# EAGLE board Power_Supply12 (EAGLE 7.6.0)
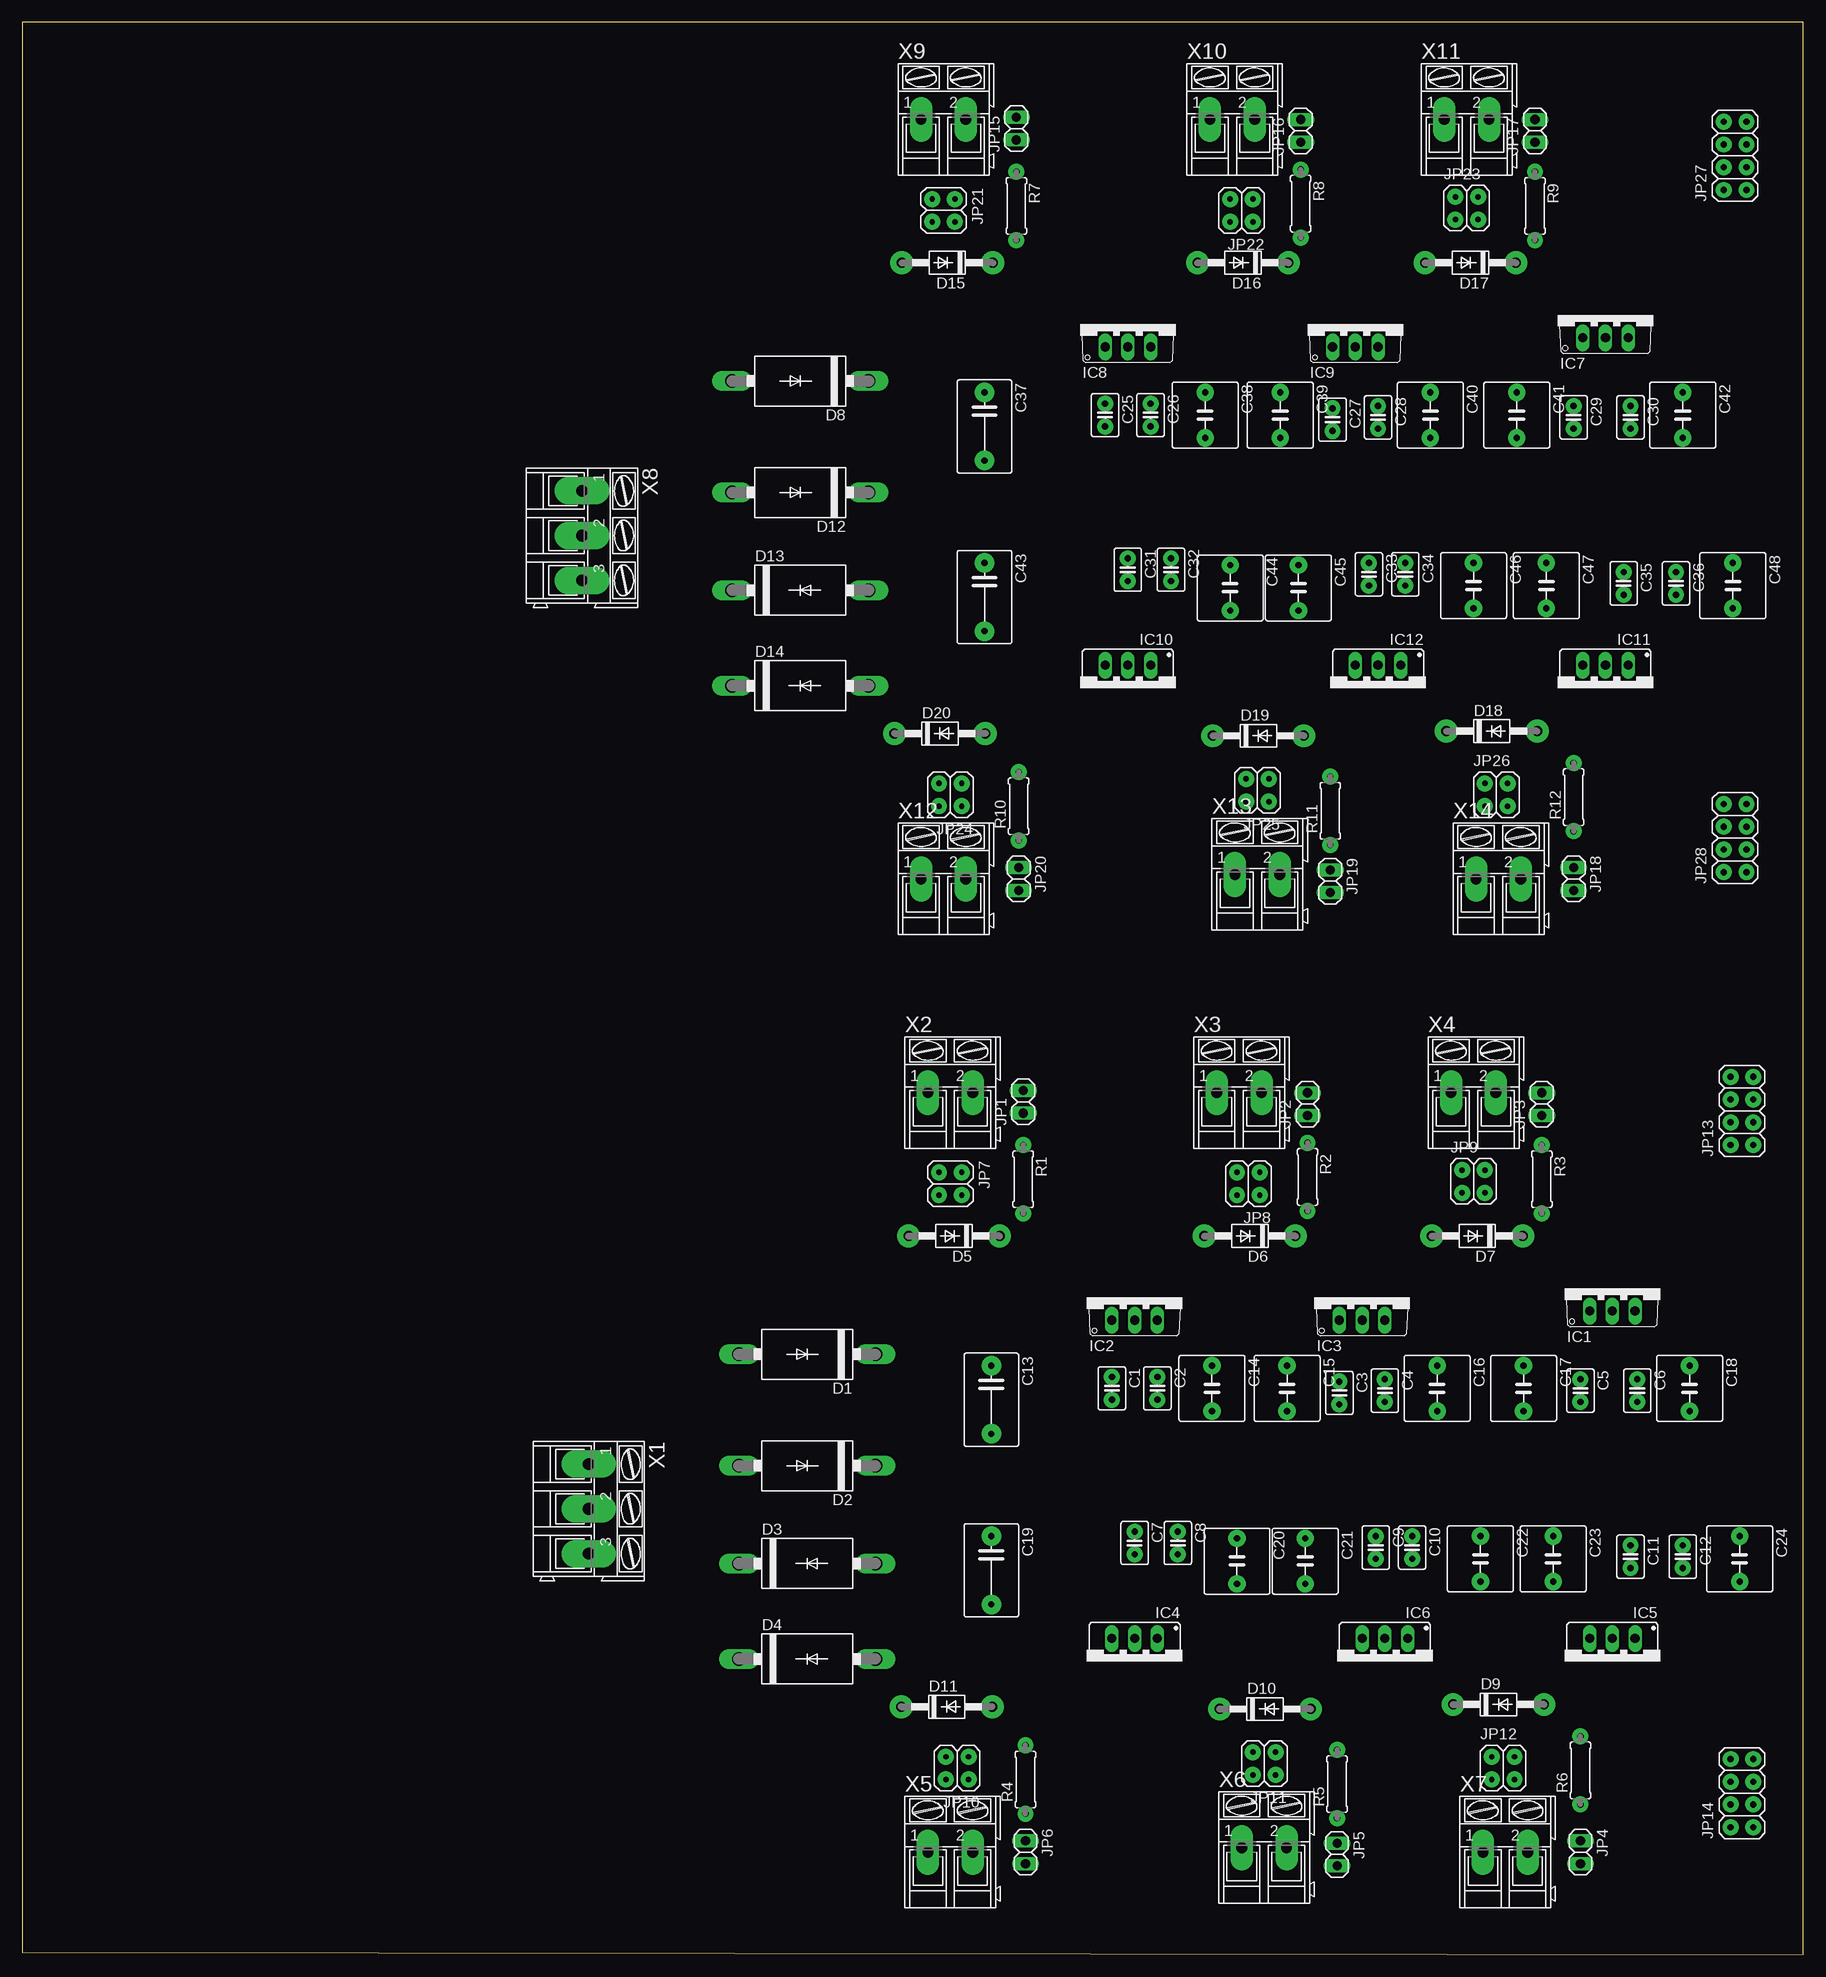
[diagram p0: board, top side]
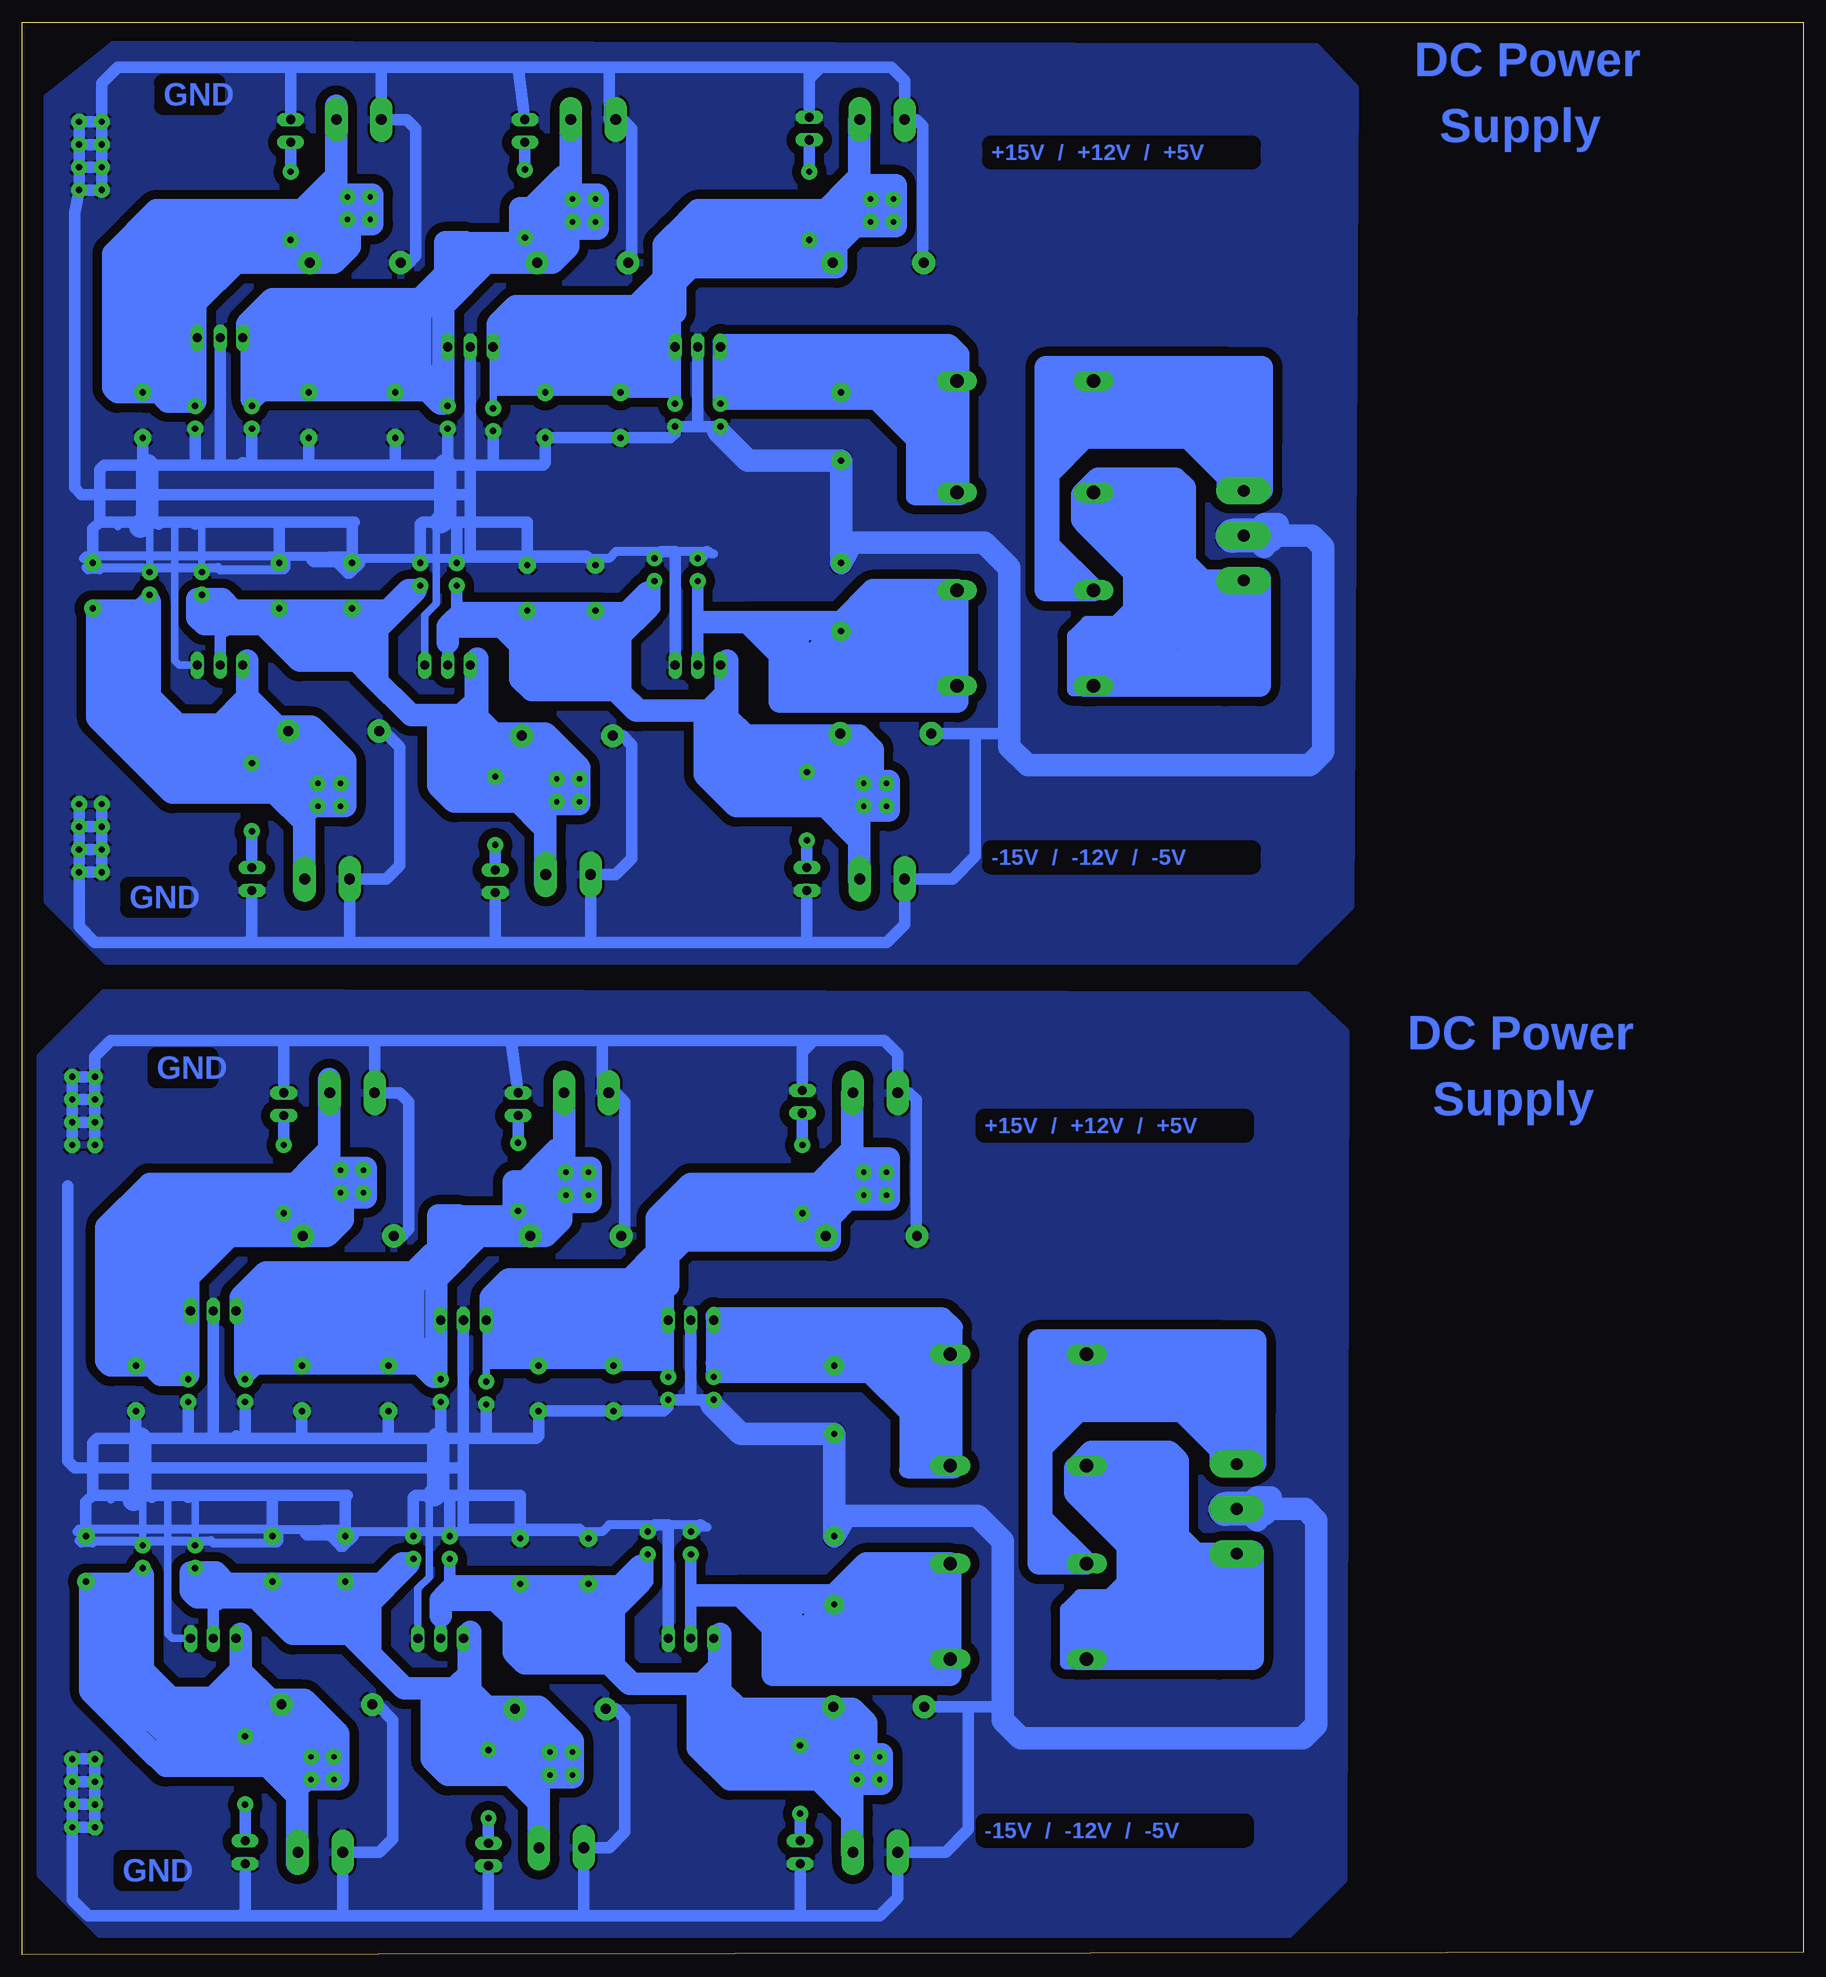
[diagram p1: board, bottom side, seen from below]

Size 198.86 x 215.82 mm. Coordinates in mm from the lower left corner, seen from the top.
Outline: 0,0.25 198.86,0 198.86,215.82 0,215.82 0,0.25
Copper layers (1*16): Top 0.035mm / dielectric 1.5mm / Bottom 0.035mm
Design rules "default": minimum track width 10mil, minimum drill 24mil, track to track 8mil, track to pad 8mil, pad to pad 8mil, via to via 8mil, smd to smd 8mil, copper to edge 40mil, drill to drill 8mil, minimum pad ring 10mil, minimum via ring 8mil, stop-mask expansion 4mil, vias tented up to drill 0mil, thermal gap 10mil

## Footprints (pad centres in the part's own frame; a part is rotated, then mirrored left to right if it is on the bottom)
C025-030X050 = drill 0.7 pad 1.778: 1 -1.27,0; 2 1.27,0
C075-063X106 = drill 0.7 pad 2.184: 1 -3.81,0; 2 3.81,0
C050-075X075 = drill 0.7 pad 1.93: 1 -2.54,0; 2 2.54,0
DO201-15 = drill 1.499 long: A 7.62,0; C -7.62,0
DO41-10 = drill 1.1 pad 2.54: A 5.08,0 | drill 1.118 pad 2.54: C -5.08,0
TO220V = drill 1.016 long: 1 -2.54,-2.54; 2 0,-2.54; 3 2.54,-2.54
79XXS = drill 1.016 long: GND -2.54,-2.54; IN 0,-2.54; OUT 2.54,-2.54
1X02 = drill 1.016 long: 1 -1.27,0; 2 1.27,0
2X02 = drill 0.6 pad 1.778: 1 -1.27,-1.27; 2 -1.27,1.27; 3 1.27,-1.27; 4 1.27,1.27
2X04 = drill 0.7 pad 1.778: 1 -3.81,-1.27; 2 -3.81,1.27; 3 -1.27,-1.27; 4 -1.27,1.27; 5 1.27,-1.27; 6 1.27,1.27; 7 3.81,-1.27; 8 3.81,1.27
0207/7 = drill 0.7 pad 1.778: 1 -3.81,0; 2 3.81,0
AK300/3 = drill 1.321 pad 3.048 long: 1 -5.004,0; 2 0,0; 3 5.004,0
AK300/2 = drill 1.2 pad 2.54 long: 1 -2.515,0; 2 2.489,0

## Placement (x,y rotation side)
C1  [C025-030X050]  121.67,63.25 270 top
C2  [C025-030X050]  126.75,63.25 270 top
C3  [C025-030X050]  147.07,62.74 270 top
C4  [C025-030X050]  152.15,62.99 270 top
C5  [C025-030X050]  173.99,62.99 270 top
C6  [C025-030X050]  180.34,62.99 270 top
C7  [C025-030X050]  124.21,45.97 270 top
C8  [C025-030X050]  129.03,45.97 270 top
C9  [C025-030X050]  151.13,45.47 270 top
C10  [C025-030X050]  155.19,45.47 270 top
C11  [C025-030X050]  179.58,44.45 270 top
C12  [C025-030X050]  185.42,44.45 270 top
C13  [C075-063X106]  108.2,61.98 270 top
C14  [C050-075X075]  132.84,63.25 270 top
C15  [C050-075X075]  141.22,63.25 270 top
C16  [C050-075X075]  157.99,63.25 270 top
C17  [C050-075X075]  167.64,63.25 270 top
C18  [C050-075X075]  186.18,63.25 270 top
C19  [C075-063X106]  108.2,42.93 270 top
C20  [C050-075X075]  135.64,43.94 270 top
C21  [C050-075X075]  143.26,43.94 270 top
C22  [C050-075X075]  162.81,44.2 270 top
C23  [C050-075X075]  170.94,44.2 270 top
C24  [C050-075X075]  191.77,44.2 270 top
C25  [C025-030X050]  120.9,171.96 270 top
C26  [C025-030X050]  125.98,171.96 270 top
C27  [C025-030X050]  146.3,171.45 270 top
C28  [C025-030X050]  151.38,171.7 270 top
C29  [C025-030X050]  173.23,171.7 270 top
C30  [C025-030X050]  179.58,171.7 270 top
C31  [C025-030X050]  123.44,154.69 270 top
C32  [C025-030X050]  128.27,154.69 270 top
C33  [C025-030X050]  150.37,154.18 270 top
C34  [C025-030X050]  154.43,154.18 270 top
C35  [C025-030X050]  178.82,153.16 270 top
C36  [C025-030X050]  184.66,153.16 270 top
C37  [C075-063X106]  107.44,170.69 270 top
C38  [C050-075X075]  132.08,171.96 270 top
C39  [C050-075X075]  140.46,171.96 270 top
C40  [C050-075X075]  157.23,171.96 270 top
C41  [C050-075X075]  166.88,171.96 270 top
C42  [C050-075X075]  185.42,171.96 270 top
C43  [C075-063X106]  107.44,151.64 270 top
C44  [C050-075X075]  134.87,152.65 270 top
C45  [C050-075X075]  142.49,152.65 270 top
C46  [C050-075X075]  162.05,152.91 270 top
C47  [C050-075X075]  170.18,152.91 270 top
C48  [C050-075X075]  191.01,152.91 270 top
D1  1N5400  [DO201-15]  87.63,67.06 180 top
D2  1N5400  [DO201-15]  87.63,54.61 180 top
D3  1N5400  [DO201-15]  87.63,43.69 0 top
D4  1N5400  [DO201-15]  87.63,33.02 0 top
D5  1N4004  [DO41-10]  104.05,80.26 180 top
D6  1N4004  [DO41-10]  137.07,80.26 180 top
D7  1N4004  [DO41-10]  162.47,80.26 180 top
D8  1N5400  [DO201-15]  86.87,175.77 180 top
D9  1N4004  [DO41-10]  164.85,27.94 0 top
D10  1N4004  [DO41-10]  138.78,27.43 0 top
D11  1N4004  [DO41-10]  103.22,27.69 0 top
D12  1N5400  [DO201-15]  86.87,163.32 180 top
D13  1N5400  [DO201-15]  86.87,152.4 0 top
D14  1N5400  [DO201-15]  86.87,141.73 0 top
D15  1N4004  [DO41-10]  103.28,188.98 180 top
D16  1N4004  [DO41-10]  136.3,188.98 180 top
D17  1N4004  [DO41-10]  161.7,188.98 180 top
D18  1N4004  [DO41-10]  164.08,136.65 0 top
D19  1N4004  [DO41-10]  138.02,136.14 0 top
D20  1N4004  [DO41-10]  102.46,136.4 0 top
IC1  7805TV  [TO220V]  177.55,74.42 0 top
IC2  7815TV  [TO220V]  124.21,73.41 0 top
IC3  7812TV  [TO220V]  149.61,73.41 0 top
IC4  [79XXS]  124.21,32.77 180 top
IC5  [79XXS]  177.55,32.77 180 top
IC6  [79XXS]  152.15,32.77 180 top
IC7  7805TV  [TO220V]  176.78,183.13 0 top
IC8  7815TV  [TO220V]  123.44,182.12 0 top
IC9  7812TV  [TO220V]  148.84,182.12 0 top
IC10  [79XXS]  123.44,141.48 180 top
IC11  [79XXS]  176.78,141.48 180 top
IC12  [79XXS]  151.38,141.48 180 top
JP1  [1X02]  111.76,95.25 90 top
JP2  [1X02]  143.51,95 90 top
JP3  [1X02]  169.67,95 90 top
JP4  [1X02]  173.99,11.43 270 top
JP5  [1X02]  146.81,11.18 270 top
JP6  [1X02]  112.01,11.43 270 top
JP7  [2X02]  103.63,86.11 270 top
JP8  [2X02]  136.91,86.11 180 top
JP9  [2X02]  162.05,86.36 0 top
JP10  [2X02]  104.39,20.83 180 top
JP11  [2X02]  138.68,21.34 180 top
JP12  [2X02]  165.35,20.83 0 top
JP13  [2X04]  192.02,94.23 90 top
JP14  [2X04]  192.02,18.03 90 top
JP15  [1X02]  111,203.96 90 top
JP16  [1X02]  142.75,203.71 90 top
JP17  [1X02]  168.91,203.71 90 top
JP18  [1X02]  173.23,120.14 270 top
JP19  [1X02]  146.05,119.89 270 top
JP20  [1X02]  111.25,120.14 270 top
JP21  [2X02]  102.87,194.82 270 top
JP22  [2X02]  136.14,194.82 180 top
JP23  [2X02]  161.29,195.07 0 top
JP24  [2X02]  103.63,129.54 180 top
JP25  [2X02]  137.92,130.05 180 top
JP26  [2X02]  164.59,129.54 0 top
JP27  [2X04]  191.26,200.91 90 top
JP28  [2X04]  191.26,124.71 90 top
R1  [0207/7]  111.76,86.61 270 top
R2  [0207/7]  143.51,86.87 270 top
R3  [0207/7]  169.67,86.61 270 top
R4  [0207/7]  112.01,19.56 90 top
R5  [0207/7]  146.81,19.05 90 top
R6  [0207/7]  173.99,20.57 90 top
R7  [0207/7]  111,195.33 270 top
R8  [0207/7]  142.75,195.58 270 top
R9  [0207/7]  168.91,195.33 270 top
R10  [0207/7]  111.25,128.27 90 top
R11  [0207/7]  146.05,127.76 90 top
R12  [0207/7]  173.23,129.29 90 top
X1  [AK300/3]  63.25,49.78 270 top
X2  [AK300/2]  103.63,96.27 0 top
X3  [AK300/2]  135.89,96.27 0 top
X4  [AK300/2]  162.05,96.27 0 top
X5  [AK300/2]  103.63,11.43 0 top
X6  [AK300/2]  138.68,11.94 0 top
X7  [AK300/2]  165.61,11.43 0 top
X8  [AK300/3]  62.48,158.5 270 top
X9  [AK300/2]  102.87,204.98 0 top
X10  [AK300/2]  135.13,204.98 0 top
X11  [AK300/2]  161.29,204.98 0 top
X12  [AK300/2]  102.87,120.14 0 top
X13  [AK300/2]  137.92,120.65 0 top
X14  [AK300/2]  164.85,120.14 0 top

## Library data of the parts
C1-C48 R1-R12 = rcl
D1-D20 = diode
IC1-IC3 IC7-IC9 = linear
IC4-IC6 IC10-IC12 = v-reg
JP1-JP28 = pinhead
X1-X14 = con-ptr500; OC_FARNELL: unknown; OC_NEWARK: unknown

## Nets
N$1: C1.1 C13.1 D1.C D2.C IC2.1
N$2: JP20.1 R10.1
N$3: C2.1 C3.1 C14.1 C15.1 D5.C IC2.3 IC3.1 JP7.1 JP7.2 JP7.3 JP7.4 R1.2 X2.2
N$4: JP19.1 R11.1
N$5: JP18.1 R12.1
N$6: D2.A D4.C X1.3
N$7: C1.2 C2.2 C3.2 C4.2 C5.2 C6.2 C7.1 C8.1 C9.1 C10.1 C11.1 C12.1 C13.2 C14.2 C15.2 C16.2 C17.2 C18.2 C19.1 C20.1 C21.1 C22.1 C23.1 C24.1 D5.A D6.A D7.A D9.C D10.C D11.C IC1.2 IC2.2 IC3.2 IC4.GND IC5.GND IC6.GND JP1.2 JP2.2 JP3.2 JP4.2 JP5.2 JP6.2 JP13.1 JP13.2 JP13.3 JP13.4 JP13.5 JP13.6 JP13.7 JP13.8 JP14.1 JP14.2 JP14.3 JP14.4 JP14.5 JP14.6 JP14.7 JP14.8 X1.2 X2.1 X3.1 X4.1 X5.1 X6.1 X7.1
N$8: C4.1 C5.1 C16.1 C17.1 D6.C IC1.1 IC3.3 JP8.1 JP8.2 JP8.3 JP8.4 R2.2 X3.2
N$9: JP17.1 R9.1
N$10: C6.1 C18.1 D7.C IC1.3 JP9.1 JP9.2 JP9.3 JP9.4 R3.2 X4.2
N$11: JP6.1 R4.1
N$12: JP16.1 R8.1
N$13: JP5.1 R5.1
N$14: JP4.1 R6.1
N$16: JP15.1 R7.1
N$17: JP3.1 R3.1
N$18: D8.A D13.C X8.1
N$19: JP2.1 R2.1
N$20: JP1.1 R1.1
N$21: D1.A D3.C X1.1
N$22: C8.2 C9.2 C20.2 C21.2 D11.A IC4.OUT IC6.IN JP10.1 JP10.2 JP10.3 JP10.4 R4.2 X5.2
N$23: C10.2 C11.2 C22.2 C23.2 D10.A IC5.IN IC6.OUT JP11.1 JP11.2 JP11.3 JP11.4 R5.2 X6.2
N$24: C7.2 C19.2 D3.A D4.A IC4.IN
N$26: C31.2 C43.2 D13.A D14.A IC10.IN
N$27: C12.2 C24.2 D9.A IC5.OUT JP12.1 JP12.2 JP12.3 JP12.4 R6.2 X7.2
N$28: C25.1 C37.1 D8.C D12.C IC8.1
N$29: C26.1 C27.1 C38.1 C39.1 D15.C IC8.3 IC9.1 JP21.1 JP21.2 JP21.3 JP21.4 R7.2 X9.2
N$30: C28.1 C29.1 C40.1 C41.1 D16.C IC7.1 IC9.3 JP22.1 JP22.2 JP22.3 JP22.4 R8.2 X10.2
N$31: C30.1 C42.1 D17.C IC7.3 JP23.1 JP23.2 JP23.3 JP23.4 R9.2 X11.2
N$32: C32.2 C33.2 C44.2 C45.2 D20.A IC10.OUT IC12.IN JP24.1 JP24.2 JP24.3 JP24.4 R10.2 X12.2
N$33: C34.2 C35.2 C46.2 C47.2 D19.A IC11.IN IC12.OUT JP25.1 JP25.2 JP25.3 JP25.4 R11.2 X13.2
N$35: C36.2 C48.2 D18.A IC11.OUT JP26.1 JP26.2 JP26.3 JP26.4 R12.2 X14.2
N$36: D12.A D14.C X8.3
N$37: C25.2 C26.2 C27.2 C28.2 C29.2 C30.2 C31.1 C32.1 C33.1 C34.1 C35.1 C36.1 C37.2 C38.2 C39.2 C40.2 C41.2 C42.2 C43.1 C44.1 C45.1 C46.1 C47.1 C48.1 D15.A D16.A D17.A D18.C D19.C D20.C IC7.2 IC8.2 IC9.2 IC10.GND IC11.GND IC12.GND JP15.2 JP16.2 JP17.2 JP18.2 JP19.2 JP20.2 JP27.1 JP27.2 JP27.3 JP27.4 JP27.5 JP27.6 JP27.7 JP27.8 JP28.1 JP28.2 JP28.3 JP28.4 JP28.5 JP28.6 JP28.7 JP28.8 X8.2 X9.1 X10.1 X11.1 X12.1 X13.1 X14.1

## Tracks (layer width: path | path; a pad name or v marks a point on that pad's centre or on a via)
N$1
  Bottom 1.27: 121.67,66.04 IC2.1 114.3,70.87 C13.1 | 121.67,64.77 C1.1
  Bottom 1.778: 121.41,71.12 121.67,71.12 | 121.67,71.12 121.67,66.04 121.67,64.77 104.39,64.77 100.08,60.45 100.08,54.1 94.74,54.1 94.74,70.1 96.01,71.37 121.67,71.37 121.67,71.12
  Bottom 2.184: 95,63.25 95,70.1 96.01,71.12 121.41,71.12
  Bottom 2.54: D2.C D1.C 110.49,67.06 C13.1
N$2
  Bottom 1.27: R10.1 JP20.1
N$3
  Bottom 0.813: C14.1 C15.1 146.81,65.79 147.07,66.04 | IC3.1 147.07,66.04 | 147.07,66.04 C3.1
  Bottom 1.27: C14.1 127,65.79 126.75,65.53 C2.1 IC2.3 126.75,74.68 126.75,77.22 121.16,82.8 R1.2 111.76,80.01 111.51,79.76 D5.C 108.97,79.92 108.97,83.82 107.95,84.84 JP7.4 JP7.2 | X2.2 106.12,88.59 JP7.2 | JP7.2 JP7.1 JP7.3
  Bottom 2.54: 106.17,89.92 106.17,84.33 | 106.17,84.33 102.11,84.33 | 102.11,84.33 102.11,88.9 105.16,88.9 105.16,87.12 104.14,86.11 124.21,86.11 126.75,83.57 | 126.75,74.68 126.75,78.99 | 126.75,78.99 126.75,80.26 | 126.75,80.26 121.92,85.09 111,85.09 | 111,85.09 102.87,85.09 102.11,84.33 | 106.17,84.33 106.68,84.33 108.71,82.3 108.71,79.76 125.22,79.76 126.24,78.74 126.24,78.99 121.67,83.57 109.98,83.57 109.47,84.07 109.47,83.06 110.74,81.79 124.46,81.79 125.73,80.52 125.73,80.01 126.75,78.99 | 126.75,80.26 126.75,83.57 | 126.75,83.57 128.02,82.3 128.02,78.49 | 128.02,70.61 128.02,67.56 128.52,67.06 146.05,67.06 146.05,70.36 146.56,70.87 146.56,73.41 144.53,75.44 131.06,75.44 128.02,78.49 | 128.02,78.49 128.02,70.61 | 128.02,70.61 129.79,68.83 129.79,73.91 129.29,74.42 143,74.42 144.53,72.9 144.53,69.34 131.32,69.34 131.32,72.39 131.57,72.39 | 131.57,72.39 142.75,72.39 142.75,71.63 143,71.37 132.59,71.37 131.57,72.39 | 106.17,96.27 106.17,89.92 | 106.17,89.92 111,85.09
N$4
  Bottom 1.27: R11.1 JP19.1
N$5
  Bottom 1.27: R12.1 JP18.1
N$6
  Bottom 1.27: 73.41,47.24 77.22,47.24 | 77.22,47.24 79.25,49.28 79.76,49.78 79.76,53.34 79.5,53.34 79.25,53.09 74.93,48.77 74.93,48.01 76.45,48.01 78.74,50.29 78.74,51.82 | 78.74,52.07 78.74,51.82 | 78.74,51.82 75.69,48.77 77.22,47.24 | 77.22,47.24 74.93,44.96 73.91,43.94 | 73.91,44.7 75.44,46.23 72.39,46.23 72.39,42.93 72.64,42.67 72.64,38.61 72.9,38.61 73.41,38.1
  Bottom 1.422: 76.96,56.64 71.37,56.64 70.87,56.13 70.36,55.63 70.36,47.5 68.07,45.21 69.6,45.21 70.61,46.23 72.14,46.23 75.18,49.28 | 80.01,56.39 81.53,54.86 81.53,51.56 80.77,50.8 | 73.91,49.02 73.91,46.23 74.42,45.72 74.42,44.7 74.42,41.66 75.95,40.13 76.45,40.13 | 79.25,40.13 80.77,40.13 82.3,38.61 82.3,32.51 79.25,32.51 77.98,33.78 80.52,33.78 81.53,34.8 81.53,35.05 77.22,39.37 75.95,39.37 73.91,37.34 | 80.77,50.8 79.25,49.28 | 79.25,49.28 79.25,50.55 80.77,52.07 80.77,50.8 | 79.25,49.28 74.93,44.96 74.93,41.66 76.45,40.13 | 80.01,39.37 81.28,38.1 81.28,36.58 81.03,36.32 81.03,36.58 79.5,38.1 79.25,38.35 78.49,38.35 | 76.45,40.13 79.25,40.13 | 79.25,40.13 80.01,39.37 | 80.01,39.37 75.44,39.37 75.18,39.62 74.93,39.88
  Bottom 2.54: 63.75,44.7 67.82,44.7 69.85,46.74 69.85,55.12 70.87,56.13 73.41,56.13 | 66.8,44.2 66.8,44.45 67.06,44.7 68.33,44.7 71.63,48.01 71.63,54.36 73.41,56.13 | 73.41,56.13 79.5,56.13 81.03,54.61 | 74.68,54.61 74.17,54.61 73.41,53.85 73.91,53.85 74.68,54.61 | 74.68,54.61 81.03,54.61 | 81.03,54.61 79.76,53.34 79.5,53.09 | 74.68,52.83 74.93,53.09 77.22,53.09 | 79.5,53.09 79.25,53.09 77.22,53.09 | 77.22,53.09 74.68,50.55 74.68,52.32 73.41,53.59 73.41,51.82 73.91,51.31 | 62.99,44.45 62.99,44.96 61.47,44.96 61.47,33.02 81.03,33.02 73.91,40.13 73.91,43.94 73.91,44.7 | D4.C 65.28,33.02 63.25,35.05 X1.3 71.7,44.78 73.91,46.99 | 73.91,46.99 73.91,47.75 | 73.91,51.31 73.91,52.83 75.69,54.61 D2.A | 73.91,46.99 73.91,44.7 | 73.91,44.7 71.88,42.67 64.77,42.67 64.77,34.54 76.96,34.54 77.22,34.29 77.22,35.31 71.12,41.4 65.79,41.4 65.53,41.15 68.33,41.15 73.66,35.81 67.56,35.81 65.28,38.1 65.53,38.1 67.31,39.88 67.31,39.12 69.34,37.08 69.34,36.83 | 73.91,51.31 73.91,49.02 73.91,47.75 | 73.91,47.75 73.41,47.24 72.39,46.23 71.63,45.47 | 79.5,53.09 81.03,53.09 81.03,51.31 | 81.03,51.31 80.52,50.8 | 80.52,50.8 75.44,45.72 | 75.44,45.72 74.93,45.21 | 74.42,44.7 74.93,45.21 | 74.93,45.21 74.93,40.89 75.95,39.88 75.44,39.88 75.18,39.62 | 81.03,54.61 81.28,54.36 81.28,51.56 81.03,51.31 | 80.52,50.8 80.52,51.56 80.01,52.07 | 75.44,45.72 75.44,41.4 | 75.44,39.37 75.44,41.4 | 75.44,41.4 77.72,39.12 78.49,39.12 79.5,38.1
N$7
  Bottom 0.813: IC6.GND 154.69,40.89 153.42,42.16 153.42,51.05 153.16,51.31 | 188.98,50.8 188.47,51.31 | 180.34,51.05 179.58,51.05 C11.1 | C12.1 185.42,51.05 185.17,51.31 | 182.37,51.31 182.63,51.05 182.63,35.81 182.12,35.31 IC5.GND
  Bottom 1.016: 122.43,47.75 122.68,47.75 122.94,48.01 123.19,48.01 126.75,48.01 133.35,48.01 134.11,47.24 163.32,47.24 163.58,47.5 165.35,47.5 | 170.94,47.5 192.53,47.5 192.79,47.24 192.28,47.24 191.01,45.97 192.28,45.97 192.53,46.23 177.8,46.23 177.55,45.97 170.43,45.97 170.18,46.23 170.18,46.74 170.94,47.5 | 170.94,47.5 165.35,47.5 | 165.35,47.5 163.32,45.47 163.07,45.47 161.8,46.74 167.13,46.74 167.39,46.99
  Bottom 1.27: 147.32,57.66 141.48,57.66 141.22,57.91 C15.2 C14.2 127.25,60.71 126.75,61.21 C2.2 124.21,61.98 | 147.32,57.66 149.61,57.66 | 149.61,57.66 152.4,57.66 | 152.4,57.66 157.99,57.66 | 157.99,57.66 167.89,57.66 | 167.89,57.66 173.74,57.66 | 173.74,57.66 175.26,57.66 | 175.26,57.66 177.8,57.66 | 177.8,57.66 180.59,57.66 | 180.59,57.66 185.67,57.66 | 185.67,57.66 186.18,58.17 C18.2 | C1.2 124.21,61.98 | C3.2 147.07,57.91 147.32,57.66 | C4.2 152.15,57.91 152.4,57.66 | C16.2 157.99,57.66 | C17.2 167.64,57.91 167.89,57.66 | 175.01,57.91 175.26,57.66 | 151.13,51.31 143.26,51.31 C21.1 | 151.13,51.31 152.91,51.31 153.16,51.31 154.94,51.31 155.19,51.05 C10.1 | 170.94,51.31 162.56,51.31 162.81,51.05 C22.1 | 170.94,51.31 180.59,51.31 | 180.59,51.31 182.37,51.31 184.66,51.31 | 184.66,51.31 185.17,51.31 188.47,51.31 191.01,51.31 | 191.01,51.31 191.77,50.55 C24.1 | C9.1 151.13,51.31 | C23.1 170.94,47.5 170.94,51.31 | 180.34,51.05 180.59,51.31 | 184.4,51.05 184.66,51.31 | IC1.2 177.55,57.91 177.8,57.66 | C5.2 173.99,57.91 173.74,57.66 | C6.2 180.34,57.91 180.59,57.66 | IC2.2 124.21,61.98 | 110.49,102.11 102.62,102.11 101.12,100.61 X2.1 99.82,96.27 99.06,95.5 99.06,79.85 D5.A | 110.49,102.11 111.76,100.84 JP1.2 111.76,102.11 | D6.A 131.57,80.42 131.57,95.25 132.59,96.27 X3.1 134.11,96.29 134.11,101.85 134.37,102.11 | 111.76,102.11 110.49,102.11 | 111.76,102.11 134.37,102.11 | 144.27,102.11 144.53,102.11 | 144.53,102.11 159.77,102.11 | 159.77,102.11 169.42,102.11 | 169.42,102.11 188.98,102.11 190.75,100.33 JP13.8 | 159.77,102.11 159.54,101.88 X4.1 156.72,96.27 155.7,95.25 155.7,81.03 156.72,80.01 D7.A | 144.53,102.11 144.27,101.85 JP2.2 144.27,102.11
  Bottom 1.27: 144.27,102.11 134.37,102.11 | JP13.8 JP13.7 JP13.5 | JP13.5 JP13.3 | JP13.3 JP13.1 | JP13.2 JP13.4 | JP13.4 JP13.6 | JP13.8 JP13.6 | JP13.6 JP13.5 | JP13.3 JP13.4 | JP14.6 JP14.8 JP14.7 JP14.5 | JP14.5 JP14.3 | JP14.3 JP14.1 | JP14.1 JP14.2 JP14.4 | JP14.6 JP14.4 | JP14.4 JP14.3 | JP14.5 JP14.6 | 93.22,27.69 89.92,27.69 89.41,27.18 | D11.C 93.22,27.69 | 93.22,27.69 93.22,13.97 95.76,11.43 X5.1 101.12,6.32 103.12,4.32 112.01,4.32 | 112.01,4.32 135.89,4.32 | 135.89,4.32 146.56,4.32 | 146.56,4.32 163.32,4.32 | 163.32,4.32 174.5,4.32 | 174.5,4.32 191.52,4.32 193.29,6.1 JP14.1 | JP5.2 146.81,4.57 146.56,4.32 | JP4.2 173.99,4.83 174.5,4.32 | 163.32,4.32 163.09,4.55 X7.1 159,11.43 157.48,12.95 157.48,26.16 159.26,27.94 D9.C | 135.89,4.32 136.17,4.6 X6.1 133.35,11.94 131.57,13.72 131.57,26.42 132.59,27.43 D10.C | JP6.2 112.01,4.32 | IC4.GND 126.75,48.01 128.27,48.01 C8.1 | C7.1 123.95,47.24 123.19,48.01 | IC3.2 149.61,57.66 | 185.67,57.66 190.5,57.66 191.01,57.15 191.01,51.31 | IC3.2 149.61,47.5 136.65,47.5 C20.1 | IC3.2 149.61,54.61 149.86,54.36 193.04,54.36 193.8,55.12 193.8,85.85 | JP3.2 169.67,101.85 169.42,102.11
  Bottom 2.54: 59.44,51.05 60.96,51.05 61.72,50.29 61.72,49.28 60.96,48.51 60.96,49.02 60.45,49.53 60.45,49.78 | 185.67,57.66 185.67,51.56 186.44,50.8 | 152.4,57.66 152.4,51.82 152.91,51.31 | X1.2 60.45,49.78 | 60.45,49.78 55.63,49.78 54.36,48.51 54.36,25.65 55.88,24.13 87.38,24.13 89.41,26.16 89.41,27.18 89.41,46.23 92.2,49.02 106.93,49.02 C19.1 C13.2 118.62,58.17 121.92,61.47
  Bottom 3.81: 60.45,49.78 64.52,49.78
  pour Bottom (isolate 1.016): 55.37,107.19 189.74,107.44 196.85,100.33 196.85,8.89 190.25,2.29 57.4,2.29 51.31,8.38 51.05,103.12
N$8
  Bottom 0.813: IC3.3 152.15,65.53 | 152.15,65.53 C4.1 | 152.15,65.53 152.4,65.79 C16.1 C17.1 173.99,65.79
  Bottom 1.27: IC1.1 174.5,71.88 | 173.99,71.37 173.99,65.79 173.99,65.02 C5.1 | 139.14,88.34 JP8.1 | JP8.1 JP8.3 JP8.4 | JP8.1 138.18,86.36 JP8.2 138.18,81.79 139.95,80.01 D6.C 143.76,80.01 144.27,80.52 R2.2 149.35,83.06 152.15,80.26 IC3.3
  Bottom 2.54: 139.19,85.85 139.19,89.92 143.51,85.6 | 139.19,85.85 139.19,84.07 | 139.19,84.07 135.38,84.07 135.38,87.88 138.43,87.88 138.43,87.12 137.16,85.85 139.19,85.85 | 139.19,84.07 139.19,83.57 138.68,83.06 138.68,82.04 140.46,80.26 140.72,80.26 | 140.72,80.26 143.76,80.26 | 143.76,80.26 144.02,80.52 | 144.02,80.52 144.02,86.36 138.18,86.36 138.18,85.34 141.99,81.53 141.99,84.58 141.48,84.58 141.22,84.84 141.22,83.31 144.02,80.52 | 144.02,80.52 148.08,80.52 151.38,77.22 151.38,79.5 150.62,80.26 147.83,80.26 | 147.83,80.26 145.8,82.3 148.34,82.3 | 148.34,82.3 149.1,81.53 141.48,81.53 140.46,80.52 140.72,80.26 | 143.76,80.26 147.83,80.26 | 147.83,80.26 152.65,75.44 152.65,64.52 152.91,64.52 154.43,66.04 172.97,66.04 173.99,65.02 173.99,71.37 174.5,71.88 174.5,73.41 171.7,76.2 155.19,76.2 150.88,80.52 150.88,78.99 155.19,74.68 155.19,68.33 154.69,67.82 171.96,67.82 172.21,68.07 172.21,73.66 171.45,74.42 156.21,74.42 156.21,69.85 156.72,69.34 169.93,69.34 170.43,69.85 170.43,72.14 158.5,72.14 158.24,72.39 158.24,71.12 157.99,70.87 168.66,70.87 169.16,71.37 163.58,71.37 163.32,71.63 | 148.34,82.3 149.86,82.3 150.11,82.55 152.4,82.55 152.4,77.22 152.91,76.71 152.91,77.47 151.13,79.25 | X3.2 138.38,87.58 JP8.1
N$9
  Bottom 1.27: JP17.1 R9.1
N$10
  Bottom 1.27: X4.2 164.54,88.85 JP9.4 | JP9.4 JP9.2 | JP9.4 JP9.3 | JP9.1 JP9.3 | JP9.3 163.32,81.03 164.34,80.01 D7.C 169.16,80.01 169.67,80.52 R3.2 177.8,82.8 180.09,80.52 180.09,75.95 180.09,72.39 | 180.09,72.39 IC1.3 180.09,66.55 180.34,66.29 180.34,64.77 C6.1 | C18.1 186.18,71.12 185.93,71.37 184.91,72.39 180.09,72.39
  Bottom 2.54: 164.59,89.92 164.59,84.84 160.78,84.84 | 160.78,84.84 160.53,84.58 | 160.53,84.58 160.53,87.88 163.83,87.88 160.78,84.84 | 160.53,84.58 162.81,84.58 163.07,84.33 163.07,82.04 164.85,80.26 174.24,80.26 | 175.77,80.26 178.56,80.26 180.34,78.49 180.34,64.77 183.39,64.77 184.4,65.79 185.93,65.79 | 185.93,65.79 185.93,69.6 184.15,71.37 182.63,71.37 182.37,71.12 182.37,67.06 181.86,66.55 182.63,66.55 184.4,68.33 184.4,68.58 183.64,69.34 183.64,68.07 185.93,65.79 | 185.93,65.79 188.98,65.79 189.48,66.29 189.48,81.28 184.66,86.11 164.08,86.11 164.08,83.82 165.86,82.04 165.86,84.58 169.93,84.58 | 169.93,84.58 183.9,84.58 187.45,81.03 187.45,77.98 | 187.45,67.82 187.45,77.98 | 187.45,77.98 182.12,83.31 167.64,83.31 166.62,82.3 180.09,82.3 185.93,76.45 185.93,74.17 | 185.93,71.37 185.93,74.17 | 185.93,74.17 181.36,78.74 181.36,73.41 182.12,72.64 183.13,72.64 184.15,73.66 183.39,73.66 182.63,74.42 182.63,78.49 182.37,78.74 182.37,78.99 179.58,81.79 175.77,81.79 174.24,80.26 | 174.24,80.26 175.77,80.26 | 175.77,80.26 180.09,75.95 180.09,79.25 179.58,79.76 181.1,79.76 185.17,75.69 185.17,79.5 185.67,80.01 | 164.59,97.79 164.59,89.92 | 164.59,89.92 169.93,84.58
N$11
  Bottom 1.27: R4.1 JP6.1
N$12
  Bottom 1.27: JP16.1 R8.1
N$13
  Bottom 1.27: R5.1 JP5.1
N$14
  Bottom 1.27: R6.1 JP4.1
N$16
  Bottom 1.27: JP15.1 R7.1
N$17
  Bottom 1.27: JP3.1 R3.1
N$18
  Bottom 2.54: X8.1 62.48,163.58 | 62.48,163.58 62.48,172.47 65.79,175.77 70.61,175.77 | 70.61,175.77 D8.A 82.04,175.77 84.33,173.48 84.33,169.93 | 84.33,156.72 84.33,153.42 83.31,152.4 D13.C | 62.48,163.58 60.71,163.58 | 60.71,163.58 60.45,163.58 60.45,173.48 64.26,177.29 | 64.26,177.29 74.42,177.29 | 74.42,177.29 84.58,177.29 84.58,152.4 D13.C | D13.C 84.07,157.23 84.07,154.94 83.06,153.92 83.06,155.45 84.33,156.72 | 84.33,156.72 84.33,165.35 | 84.33,165.35 84.33,169.93 | 84.33,169.93 78.23,176.02 75.69,176.02 74.42,177.29 | 64.26,177.29 60.45,177.29 60.45,169.16 60.71,168.91 67.82,176.02 66.55,176.02 62.23,171.7 64.26,171.7 64.26,163.58 62.48,163.58 | 60.71,163.58 60.71,165.86 70.61,175.77 | 70.61,175.77 70.61,174.5 65.79,169.67 | 65.79,169.67 63.5,167.39 63.5,167.64 67.56,171.7 80.01,171.7 84.07,167.64 84.07,167.89 77.98,173.99 71.37,173.99 70.61,173.23 70.61,171.45 | 70.61,171.45 64.52,165.35 | 70.61,171.45 71.37,172.21 77.47,172.21 80.26,169.42 | 84.33,165.35 80.26,169.42 | 80.26,169.42 66.04,169.42 65.79,169.67 | 65.79,169.67 66.04,169.67 66.29,169.93
N$19
  Bottom 1.27: JP2.1 R2.1
N$20
  Bottom 1.27: JP1.1 R1.1
N$21
  Bottom 2.54: X1.1 63.25,54.86 | 63.25,54.86 63.25,63.75 66.55,67.06 71.37,67.06 | 71.37,67.06 D1.A 82.8,67.06 85.09,64.77 85.09,61.21 | 85.09,48.01 85.09,44.7 84.07,43.69 D3.C | 63.25,54.86 61.47,54.86 | 61.47,54.86 61.21,54.86 61.21,64.77 65.02,68.58 | 65.02,68.58 75.18,68.58 | 75.18,68.58 85.34,68.58 85.34,43.69 D3.C | D3.C 84.84,48.51 84.84,46.23 83.82,45.21 83.82,46.74 85.09,48.01 | 85.09,48.01 85.09,56.64 | 85.09,56.64 85.09,61.21 | 85.09,61.21 78.99,67.31 76.45,67.31 75.18,68.58 | 65.02,68.58 61.21,68.58 61.21,60.45 61.47,60.2 68.58,67.31 67.31,67.31 62.99,62.99 65.02,62.99 65.02,54.86 63.25,54.86 | 61.47,54.86 61.47,57.15 71.37,67.06 | 71.37,67.06 71.37,65.79 66.55,60.96 | 66.55,60.96 64.26,58.67 64.26,58.93 68.33,62.99 80.77,62.99 84.84,58.93 84.84,59.18 78.74,65.28 72.14,65.28 71.37,64.52 71.37,62.74 | 71.37,62.74 65.28,56.64 | 71.37,62.74 72.14,63.5 78.23,63.5 81.03,60.71 | 85.09,56.64 81.03,60.71 | 81.03,60.71 66.8,60.71 66.55,60.96 | 66.55,60.96 66.8,60.96 67.06,61.21
N$22
  Bottom 1.27: 121.67,30.23 121.67,27.94 121.67,26.42 118.62,23.37 R4.2 108.81,23.37 108.3,22.86 | X5.2 106.12,19.1 JP10.2 105.66,21.59 | JP10.4 JP10.3 JP10.1 105.66,21.59 | D11.A 108.3,22.86 | 108.3,22.86 108.3,22.45 107.95,22.1 106.17,22.1 105.66,21.59 | IC4.OUT 121.67,30.23 | 121.67,30.23 123.19,30.23 131.06,30.23 131.57,30.23 135.64,34.29 135.64,34.8 C20.2 | C8.2 129.03,41.66 129.29,41.4 C20.2 | C20.2 C21.2 151.13,41.4 | C9.2 151.13,41.4 | 151.13,41.4 151.13,40.39 152.15,39.37 | 152.15,37.85 IC6.IN
  Bottom 2.54: 106.43,19.56 119.89,19.56 123.44,23.11 123.44,29.72 120.9,32.26 | 106.17,15.75 106.17,22.35 104.65,22.35 | 104.65,22.35 102.87,22.35 102.87,19.05 105.41,19.05 105.41,19.56 104.65,20.32 104.65,22.35 | 104.65,22.35 104.65,25.91 106.17,27.43 118.87,27.43 120.9,29.46 | 120.9,29.46 120.9,32.26 | 120.9,32.26 120.9,35.81 | 120.9,29.46 120.9,23.37 120.4,23.37 118.62,21.59 107.95,21.59 107.7,21.34 107.7,25.15 107.44,25.4 105.92,23.88 107.95,23.88 109.47,25.4 111.25,25.4 | 120.4,25.4 111.25,25.4 | 111.25,25.4 110.24,24.38 118.11,24.38 121.67,27.94 | 123.19,30.23 130.81,30.23 132.84,32.26 | 133.6,33.02 135.38,34.8 135.38,41.15 | 135.38,41.15 135.13,41.15 | 135.13,41.15 132.08,41.15 129.79,43.43 129.79,41.66 132.84,38.61 132.84,32.26 | 132.84,32.26 133.6,33.02 | 133.6,33.02 133.6,39.62 135.13,41.15 | 135.38,41.15 150.62,41.15 151.89,39.88 151.89,39.62 152.15,39.37 | 152.15,39.37 152.15,37.85 | 152.15,39.37 152.15,39.62 146.05,39.62 144.02,37.59 144.02,33.78 142.75,32.51 133.35,32.51 | 133.35,32.51 131.06,30.23 | 133.35,32.51 135.64,34.8 135.64,38.35 136.65,39.37 143.76,39.37 143.76,36.83 140.97,34.04 136.65,34.04 136.4,33.78 136.4,35.81 | 136.4,35.81 136.4,36.32 137.16,37.08 141.48,37.08 142.24,37.85 142.24,37.59 139.95,35.31 136.91,35.31 136.4,35.81 | 106.17,11.18 106.17,15.75 | 106.17,15.75 110.49,20.07
N$23
  Bottom 1.27: 149.61,30.23 149.61,29.97 147.07,27.43 D10.A 143.86,24.13 | 143.86,24.13 143.86,23.97 142.49,22.61 JP11.1 | JP11.1 JP11.3 JP11.4 | JP11.1 JP11.2 140.21,20.07 141.22,19.05 141.22,11.99 X6.2 | R5.2 145.13,22.86 143.86,24.13 | IC6.OUT 149.61,30.23 | 149.61,30.23 157.23,30.23 162.81,35.81 C22.2 | C10.2 156.46,44.2 159,41.66 C22.2 | C22.2 C23.2 176.28,41.66 176.4,41.78 | 176.4,41.78 177.8,43.18 C11.2 | IC5.IN 177.55,40.64 176.4,41.78
  Bottom 2.54: 148.84,36.07 148.84,31.5 | 148.84,31.5 148.84,29.46 147.07,27.69 141.22,27.69 137.41,23.88 137.41,19.81 141.22,19.81 | 141.22,19.81 141.22,17.02 | 141.22,19.81 141.22,20.07 151.38,20.07 153.16,21.84 153.16,29.46 150.37,29.46 144.78,23.88 144.78,25.91 141.48,25.91 138.94,23.37 138.94,21.59 139.45,21.59 142.24,24.38 142.24,21.84 141.99,21.59 143,21.59 144.02,22.61 142.49,22.61 141.48,21.59 150.88,21.59 151.89,22.61 151.89,27.18 152.15,27.43 150.88,27.43 145.8,22.35 148.08,22.35 150.37,24.64 150.11,24.64 149.86,24.89 149.86,27.43 152.15,29.72 | 152.15,29.72 150.62,29.72 148.84,31.5 | 152.15,29.72 156.21,29.72 160.53,34.04 | 162.31,35.81 162.31,41.15 158.24,41.15 | 158.24,41.15 157.99,41.4 | 157.99,41.4 155.7,43.69 156.46,43.69 158.75,41.4 | 158.75,41.4 157.99,41.4 | 158.24,41.15 161.54,37.85 161.54,38.1 160.02,39.62 160.02,34.29 160.27,34.04 160.53,34.04 | 160.53,34.04 162.31,35.81 | 162.31,35.81 168.66,35.81 173.23,40.39 176.53,40.39 177.29,39.62 177.29,39.88 | 177.29,39.88 179.32,39.88 180.09,40.64 180.09,42.67 177.29,42.67 176.28,41.66 178.31,41.66 178.56,41.4 158.75,41.4 | 158.75,41.4 159.77,40.39 170.94,40.39 | 171.45,40.39 170.94,40.39 | 170.94,40.39 170.43,39.88 | 166.12,38.35 163.58,38.35 164.59,37.34 167.89,37.34 170.43,39.88 | 168.15,38.35 166.12,38.35 | 166.12,38.35 165.35,39.12 | 177.29,39.88 170.43,39.88 | 141.22,10.92 141.22,17.02 | 141.22,17.02 144.78,20.57
N$24
  Bottom 1.27: 113.03,40.13 123.19,40.13 124.21,39.12 IC4.IN C7.2
  Bottom 2.54: D4.A D3.A 104.65,43.69 108.2,40.13 | D4.A 109.47,33.02 112.27,35.81 C19.2 112.27,39.37 113.03,40.13 | 108.71,39.62 108.2,40.13 | 108.2,40.13 118.62,40.13 | 123.44,40.13 118.62,40.13 | 118.62,40.13 115.06,36.58 115.06,31.24 | D4.A 95.25,31.24 114.55,31.24 114.81,31.5 114.81,38.35 114.55,38.61 113.79,38.61 113.03,37.85 113.03,33.78 113.28,33.53 96.77,33.53 96.77,41.91 104.39,41.91 104.65,42.16 104.65,41.15 109.98,35.81 98.3,35.81 98.04,35.56 98.04,39.62 99.06,40.64 102.36,40.64 106.17,36.83 101.35,36.83 99.57,38.61 102.87,38.61 104.14,37.34 104.14,35.05 104.39,34.8
N$25
  Bottom 2.54: 174.5,35.81 174.5,31.75 | 174.5,31.75 174.5,29.46 | 174.5,29.46 173.48,28.45 171.2,28.45 | 167.64,28.45 167.39,28.45 163.58,24.64 163.58,19.56 168.15,19.56 | 168.15,19.81 168.15,21.08 | 168.15,21.08 168.15,25.91 | 168.15,26.67 168.15,25.91 | 168.15,25.91 164.59,22.35 164.85,22.35 165.86,21.34 166.88,21.34 167.89,20.32 167.89,20.07 168.15,19.81 | 168.15,19.56 168.15,17.78 | 168.15,19.56 168.15,19.81 | 168.15,21.08 171.2,21.08 | 171.2,21.08 182.88,21.08 186.18,24.38 186.18,28.7 177.55,28.7 174.5,31.75 | 174.5,29.46 174.5,22.35 170.94,22.35 170.69,22.61 170.69,26.16 171.7,26.16 171.96,26.42 171.96,25.4 172.72,24.64 172.72,25.91 173.23,26.42 173.99,26.42 175.51,27.94 175.51,23.37 176.28,22.61 180.85,22.61 185.17,26.92 177.04,26.92 176.28,26.16 176.28,24.13 176.53,23.88 180.59,23.88 181.86,25.15 170.94,25.15 167.64,28.45 | 167.64,28.45 171.2,28.45 | 171.2,28.45 174.24,31.5 174.24,29.46 176.28,27.43 | 168.15,10.16 168.15,17.78 | 168.15,17.78 171.2,20.83 171.2,21.08
N$26
  Bottom 1.27: 112.27,148.84 122.43,148.84 123.44,147.83 IC10.IN C31.2
  Bottom 2.54: D14.A D13.A 103.89,152.4 107.44,148.84 | D14.A 108.71,141.73 111.51,144.53 C43.2 111.51,148.08 112.27,148.84 | 107.95,148.34 107.44,148.84 | 107.44,148.84 117.86,148.84 | 122.68,148.84 117.86,148.84 | 117.86,148.84 114.3,145.29 114.3,139.95 | D14.A 94.49,139.95 113.79,139.95 114.05,140.21 114.05,147.07 113.79,147.32 113.03,147.32 112.27,146.56 112.27,142.49 112.52,142.24 96.01,142.24 96.01,150.62 103.63,150.62 103.89,150.88 103.89,149.86 109.22,144.53 97.54,144.53 97.28,144.27 97.28,148.34 98.3,149.35 101.6,149.35 105.41,145.54 100.58,145.54 98.81,147.32 102.11,147.32 103.38,146.05 103.38,143.76 103.63,143.51
N$27
  Bottom 1.27: JP12.2 JP12.4 | JP12.4 JP12.3 | JP12.3 JP12.1 | JP12.3 166.62,19.3 168.15,17.78 168.15,11.48 X7.2 | 169.93,25.15 D9.A 173.99,27.94 175.01,28.96 175.01,29.21 | 169.93,25.15 170.69,24.38 R6.2 | JP12.4 168.66,22.1 169.93,23.37 169.93,25.15 | IC5.OUT 175.01,29.21 | 175.01,29.21 189.48,29.21 191.77,31.5 C24.2 185.42,41.66 185.42,42.42 C12.2
  Bottom 2.54: 183.64,22.1 183.9,22.1 191.26,29.46 191.26,41.4 186.44,41.4 185.42,42.42 185.42,41.15 | 185.42,41.15 185.42,31.75 182.63,28.96 | 185.42,41.15 186.94,39.62 189.23,39.62 189.23,34.8 | 189.23,31.75 189.23,29.72 187.96,28.45 186.69,29.72 | 186.69,29.72 186.18,30.23 186.18,37.08 187.71,38.61 187.71,33.53 | 187.71,31.24 187.71,30.73 186.69,29.72 | 186.69,29.72 186.69,30.23 187.71,31.24 | 187.71,31.24 187.71,33.53 | 187.71,33.53 188.21,34.04 188.21,32.77 189.23,31.75 | 189.23,31.75 189.23,34.8 | 189.23,34.8 187.96,36.07 187.96,33.27 183.64,28.96
N$28
  Bottom 1.27: 120.9,174.75 IC8.1 113.54,179.58 C37.1 | 120.9,173.48 C25.1
  Bottom 1.778: 120.65,179.83 120.9,179.83 | 120.9,179.83 120.9,174.75 120.9,173.48 103.63,173.48 99.31,169.16 99.31,162.81 93.98,162.81 93.98,178.82 95.25,180.09 120.9,180.09 120.9,179.83
  Bottom 2.184: 94.23,171.96 94.23,178.82 95.25,179.83 120.65,179.83
  Bottom 2.54: D12.C D8.C 109.73,175.77 C37.1
N$29
  Bottom 0.813: C38.1 C39.1 146.05,174.5 146.3,174.75 | IC9.1 146.3,174.75 | 146.3,174.75 C27.1
  Bottom 1.27: C38.1 126.24,174.5 125.98,174.24 C26.1 IC8.3 125.98,183.39 125.98,185.93 120.4,191.52 R7.2 111,188.72 110.74,188.47 D15.C 108.2,188.63 108.2,192.53 107.19,193.55 JP21.4 JP21.2 | X9.2 105.36,197.31 JP21.2 | JP21.2 JP21.1 JP21.3
  Bottom 2.54: 105.41,198.63 105.41,193.04 | 105.41,193.04 101.35,193.04 | 101.35,193.04 101.35,197.61 104.39,197.61 104.39,195.83 103.38,194.82 123.44,194.82 125.98,192.28 | 125.98,183.39 125.98,187.71 | 125.98,187.71 125.98,188.98 | 125.98,188.98 121.16,193.8 110.24,193.8 | 110.24,193.8 102.11,193.8 101.35,193.04 | 105.41,193.04 105.92,193.04 107.95,191.01 107.95,188.47 124.46,188.47 125.48,187.45 125.48,187.71 120.9,192.28 109.22,192.28 108.71,192.79 108.71,191.77 109.98,190.5 123.7,190.5 124.97,189.23 124.97,188.72 125.98,187.71 | 125.98,188.98 125.98,192.28 | 125.98,192.28 127.25,191.01 127.25,187.2 | 127.25,179.32 127.25,176.28 127.76,175.77 145.29,175.77 145.29,179.07 145.8,179.58 145.8,182.12 143.76,184.15 130.3,184.15 127.25,187.2 | 127.25,187.2 127.25,179.32 | 127.25,179.32 129.03,177.55 129.03,182.63 128.52,183.13 142.24,183.13 143.76,181.61 143.76,178.05 130.56,178.05 130.56,181.1 130.81,181.1 | 130.81,181.1 141.99,181.1 141.99,180.34 142.24,180.09 131.83,180.09 130.81,181.1 | 105.41,204.98 105.41,198.63 | 105.41,198.63 110.24,193.8
N$30
  Bottom 0.813: IC9.3 151.38,174.24 | 151.38,174.24 C28.1 | 151.38,174.24 151.64,174.5 C40.1 C41.1 173.23,174.5
  Bottom 1.27: IC7.1 173.74,180.59 | 173.23,180.09 173.23,174.5 173.23,173.74 C29.1 | 138.38,197.05 JP22.1 | JP22.1 JP22.3 JP22.4 | JP22.1 137.41,195.07 JP22.2 137.41,190.5 139.19,188.72 D16.C 143,188.72 143.51,189.23 R8.2 148.59,191.77 151.38,188.98 IC9.3
  Bottom 2.54: 138.43,194.56 138.43,198.63 142.75,194.31 | 138.43,194.56 138.43,192.79 | 138.43,192.79 134.62,192.79 134.62,196.6 137.67,196.6 137.67,195.83 136.4,194.56 138.43,194.56 | 138.43,192.79 138.43,192.28 137.92,191.77 137.92,190.75 139.7,188.98 139.95,188.98 | 139.95,188.98 143,188.98 | 143,188.98 143.26,189.23 | 143.26,189.23 143.26,195.07 137.41,195.07 137.41,194.06 141.22,190.25 141.22,193.29 140.72,193.29 140.46,193.55 140.46,192.02 143.26,189.23 | 143.26,189.23 147.32,189.23 150.62,185.93 150.62,188.21 149.86,188.98 147.07,188.98 | 147.07,188.98 145.03,191.01 147.57,191.01 | 147.57,191.01 148.34,190.25 140.72,190.25 139.7,189.23 139.95,188.98 | 143,188.98 147.07,188.98 | 147.07,188.98 151.89,184.15 151.89,173.23 152.15,173.23 153.67,174.75 172.21,174.75 173.23,173.74 173.23,180.09 173.74,180.59 173.74,182.12 170.94,184.91 154.43,184.91 150.11,189.23 150.11,187.71 154.43,183.39 154.43,177.04 153.92,176.53 171.2,176.53 171.45,176.78 171.45,182.37 170.69,183.13 155.45,183.13 155.45,178.56 155.96,178.05 169.16,178.05 169.67,178.56 169.67,180.85 157.73,180.85 157.48,181.1 157.48,179.83 157.23,179.58 167.89,179.58 168.4,180.09 162.81,180.09 162.56,180.34 | 147.57,191.01 149.1,191.01 149.35,191.26 151.64,191.26 151.64,185.93 152.15,185.42 152.15,186.18 150.37,187.96 | X10.2 137.62,196.29 JP22.1
N$31
  Bottom 1.27: X11.2 163.78,197.56 JP23.4 | JP23.4 JP23.2 | JP23.4 JP23.3 | JP23.1 JP23.3 | JP23.3 162.56,189.74 163.58,188.72 D17.C 168.4,188.72 168.91,189.23 R9.2 177.04,191.52 179.32,189.23 179.32,184.66 179.32,181.1 | 179.32,181.1 IC7.3 179.32,175.26 179.58,175.01 179.58,173.48 C30.1 | C42.1 185.42,179.83 185.17,180.09 184.15,181.1 179.32,181.1
  Bottom 2.54: 163.83,198.63 163.83,193.55 160.02,193.55 | 160.02,193.55 159.77,193.29 | 159.77,193.29 159.77,196.6 163.07,196.6 160.02,193.55 | 159.77,193.29 162.05,193.29 162.31,193.04 162.31,190.75 164.08,188.98 173.48,188.98 | 175.01,188.98 177.8,188.98 179.58,187.2 179.58,173.48 182.63,173.48 183.64,174.5 185.17,174.5 | 185.17,174.5 185.17,178.31 183.39,180.09 181.86,180.09 181.61,179.83 181.61,175.77 181.1,175.26 181.86,175.26 183.64,177.04 183.64,177.29 182.88,178.05 182.88,176.78 185.17,174.5 | 185.17,174.5 188.21,174.5 188.72,175.01 188.72,189.99 183.9,194.82 163.32,194.82 163.32,192.53 165.1,190.75 165.1,193.29 169.16,193.29 | 169.16,193.29 183.13,193.29 186.69,189.74 186.69,186.69 | 186.69,176.53 186.69,186.69 | 186.69,186.69 181.36,192.02 166.88,192.02 165.86,191.01 179.32,191.01 185.17,185.17 185.17,182.88 | 185.17,180.09 185.17,182.88 | 185.17,182.88 180.59,187.45 180.59,182.12 181.36,181.36 182.37,181.36 183.39,182.37 182.63,182.37 181.86,183.13 181.86,187.2 181.61,187.45 181.61,187.71 178.82,190.5 175.01,190.5 173.48,188.98 | 173.48,188.98 175.01,188.98 | 175.01,188.98 179.32,184.66 179.32,187.96 178.82,188.47 180.34,188.47 184.4,184.4 184.4,188.21 184.91,188.72 | 163.83,206.5 163.83,198.63 | 163.83,198.63 169.16,193.29
N$32
  Bottom 1.27: 120.9,138.94 120.9,136.65 120.9,135.13 117.86,132.08 R10.2 108.04,132.08 107.54,131.57 | X12.2 105.36,127.81 JP24.2 104.9,130.3 | JP24.4 JP24.3 JP24.1 104.9,130.3 | D20.A 107.54,131.57 | 107.54,131.57 107.54,131.16 107.19,130.81 105.41,130.81 104.9,130.3 | IC10.OUT 120.9,138.94 | 120.9,138.94 122.43,138.94 130.3,138.94 130.81,138.94 134.87,143 134.87,143.51 C44.2 | C32.2 128.27,150.37 128.52,150.11 C44.2 | C44.2 C45.2 150.37,150.11 | C33.2 150.37,150.11 | 150.37,150.11 150.37,149.1 151.38,148.08 | 151.38,146.56 IC12.IN
  Bottom 2.54: 105.66,128.27 119.13,128.27 122.68,131.83 122.68,138.43 120.14,140.97 | 105.41,124.46 105.41,131.06 103.89,131.06 | 103.89,131.06 102.11,131.06 102.11,127.76 104.65,127.76 104.65,128.27 103.89,129.03 103.89,131.06 | 103.89,131.06 103.89,134.62 105.41,136.14 118.11,136.14 120.14,138.18 | 120.14,138.18 120.14,140.97 | 120.14,140.97 120.14,144.53 | 120.14,138.18 120.14,132.08 119.63,132.08 117.86,130.3 107.19,130.3 106.93,130.05 106.93,133.86 106.68,134.11 105.16,132.59 107.19,132.59 108.71,134.11 110.49,134.11 | 119.63,134.11 110.49,134.11 | 110.49,134.11 109.47,133.1 117.35,133.1 120.9,136.65 | 122.43,138.94 130.05,138.94 132.08,140.97 | 132.84,141.73 134.62,143.51 134.62,149.86 | 134.62,149.86 134.37,149.86 | 134.37,149.86 131.32,149.86 129.03,152.15 129.03,150.37 132.08,147.32 132.08,140.97 | 132.08,140.97 132.84,141.73 | 132.84,141.73 132.84,148.34 134.37,149.86 | 134.62,149.86 149.86,149.86 151.13,148.59 151.13,148.34 151.38,148.08 | 151.38,148.08 151.38,146.56 | 151.38,148.08 151.38,148.34 145.29,148.34 143.26,146.3 143.26,142.49 141.99,141.22 132.59,141.22 | 132.59,141.22 130.3,138.94 | 132.59,141.22 134.87,143.51 134.87,147.07 135.89,148.08 143,148.08 143,145.54 140.21,142.75 135.89,142.75 135.64,142.49 135.64,144.53 | 135.64,144.53 135.64,145.03 136.4,145.8 140.72,145.8 141.48,146.56 141.48,146.3 139.19,144.02 136.14,144.02 135.64,144.53 | 105.41,119.89 105.41,124.46 | 105.41,124.46 109.73,128.78
N$33
  Bottom 1.27: 148.84,138.94 148.84,138.68 146.3,136.14 D19.A 143.1,132.84 | 143.1,132.84 143.1,132.68 141.73,131.32 JP25.1 | JP25.1 JP25.3 JP25.4 | JP25.1 JP25.2 139.45,128.78 140.46,127.76 140.46,120.7 X13.2 | R11.2 144.37,131.57 143.1,132.84 | IC12.OUT 148.84,138.94 | 148.84,138.94 156.46,138.94 162.05,144.53 C46.2 | C34.2 155.7,152.91 158.24,150.37 C46.2 | C46.2 C47.2 175.51,150.37 175.64,150.5 | 175.64,150.5 177.04,151.89 C35.2 | IC11.IN 176.78,149.35 175.64,150.5
  Bottom 2.54: 148.08,144.78 148.08,140.21 | 148.08,140.21 148.08,138.18 146.3,136.4 140.46,136.4 136.65,132.59 136.65,128.52 140.46,128.52 | 140.46,128.52 140.46,125.73 | 140.46,128.52 140.46,128.78 150.62,128.78 152.4,130.56 152.4,138.18 149.61,138.18 144.02,132.59 144.02,134.62 140.72,134.62 138.18,132.08 138.18,130.3 138.68,130.3 141.48,133.1 141.48,130.56 141.22,130.3 142.24,130.3 143.26,131.32 141.73,131.32 140.72,130.3 150.11,130.3 151.13,131.32 151.13,135.89 151.38,136.14 150.11,136.14 145.03,131.06 147.32,131.06 149.61,133.35 149.35,133.35 149.1,133.6 149.1,136.14 151.38,138.43 | 151.38,138.43 149.86,138.43 148.08,140.21 | 151.38,138.43 155.45,138.43 159.77,142.75 | 161.54,144.53 161.54,149.86 157.48,149.86 | 157.48,149.86 157.23,150.11 | 157.23,150.11 154.94,152.4 155.7,152.4 157.99,150.11 | 157.99,150.11 157.23,150.11 | 157.48,149.86 160.78,146.56 160.78,146.81 159.26,148.34 159.26,143 159.51,142.75 159.77,142.75 | 159.77,142.75 161.54,144.53 | 161.54,144.53 167.89,144.53 172.47,149.1 175.77,149.1 176.53,148.34 176.53,148.59 | 176.53,148.59 178.56,148.59 179.32,149.35 179.32,151.38 176.53,151.38 175.51,150.37 177.55,150.37 177.8,150.11 157.99,150.11 | 157.99,150.11 159,149.1 170.18,149.1 | 170.69,149.1 170.18,149.1 | 170.18,149.1 169.67,148.59 | 165.35,147.07 162.81,147.07 163.83,146.05 167.13,146.05 169.67,148.59 | 167.39,147.07 165.35,147.07 | 165.35,147.07 164.59,147.83 | 176.53,148.59 169.67,148.59 | 140.46,119.63 140.46,125.73 | 140.46,125.73 144.02,129.29
N$34
  Bottom 2.54: 173.74,144.53 173.74,140.46 | 173.74,140.46 173.74,138.18 | 173.74,138.18 172.72,137.16 170.43,137.16 | 166.88,137.16 166.62,137.16 162.81,133.35 162.81,128.27 167.39,128.27 | 167.39,128.52 167.39,129.79 | 167.39,129.79 167.39,134.62 | 167.39,135.38 167.39,134.62 | 167.39,134.62 163.83,131.06 164.08,131.06 165.1,130.05 166.12,130.05 167.13,129.03 167.13,128.78 167.39,128.52 | 167.39,128.27 167.39,126.49 | 167.39,128.27 167.39,128.52 | 167.39,129.79 170.43,129.79 | 170.43,129.79 182.12,129.79 185.42,133.1 185.42,137.41 176.78,137.41 173.74,140.46 | 173.74,138.18 173.74,131.06 170.18,131.06 169.93,131.32 169.93,134.87 170.94,134.87 171.2,135.13 171.2,134.11 171.96,133.35 171.96,134.62 172.47,135.13 173.23,135.13 174.75,136.65 174.75,132.08 175.51,131.32 180.09,131.32 184.4,135.64 176.28,135.64 175.51,134.87 175.51,132.84 175.77,132.59 179.83,132.59 181.1,133.86 170.18,133.86 166.88,137.16 | 166.88,137.16 170.43,137.16 | 170.43,137.16 173.48,140.21 173.48,138.18 175.51,136.14 | 167.39,118.87 167.39,126.49 | 167.39,126.49 170.43,129.54 170.43,129.79
N$35
  Bottom 1.27: JP26.2 JP26.4 | JP26.4 JP26.3 | JP26.3 JP26.1 | JP26.3 165.86,128.02 167.39,126.49 167.39,120.19 X14.2 | 169.16,133.86 D18.A 173.23,136.65 174.24,137.67 174.24,137.92 | 169.16,133.86 169.93,133.1 R12.2 | JP26.4 167.89,130.81 169.16,132.08 169.16,133.86 | IC11.OUT 174.24,137.92 | 174.24,137.92 188.72,137.92 191.01,140.21 C48.2 184.66,150.37 184.66,151.13 C36.2
  Bottom 2.54: 182.88,130.81 183.13,130.81 190.5,138.18 190.5,150.11 185.67,150.11 184.66,151.13 184.66,149.86 | 184.66,149.86 184.66,140.46 181.86,137.67 | 184.66,149.86 186.18,148.34 188.47,148.34 188.47,143.51 | 188.47,140.46 188.47,138.43 187.2,137.16 185.93,138.43 | 185.93,138.43 185.42,138.94 185.42,145.8 186.94,147.32 186.94,142.24 | 186.94,139.95 186.94,139.45 185.93,138.43 | 185.93,138.43 185.93,138.94 186.94,139.95 | 186.94,139.95 186.94,142.24 | 186.94,142.24 187.45,142.75 187.45,141.48 188.47,140.46 | 188.47,140.46 188.47,143.51 | 188.47,143.51 187.2,144.78 187.2,141.99 182.88,137.67
N$36
  Bottom 1.27: 72.64,155.96 76.45,155.96 | 76.45,155.96 78.49,157.99 78.99,158.5 78.99,162.05 78.74,162.05 78.49,161.8 74.17,157.48 74.17,156.72 75.69,156.72 77.98,159 77.98,160.53 | 77.98,160.78 77.98,160.53 | 77.98,160.53 74.93,157.48 76.45,155.96 | 76.45,155.96 74.17,153.67 73.15,152.65 | 73.15,153.42 74.68,154.94 71.63,154.94 71.63,151.64 71.88,151.38 71.88,147.32 72.14,147.32 72.64,146.81
  Bottom 1.422: 76.2,165.35 70.61,165.35 70.1,164.85 69.6,164.34 69.6,156.21 67.31,153.92 68.83,153.92 69.85,154.94 71.37,154.94 74.42,157.99 | 79.25,165.1 80.77,163.58 80.77,160.27 80.01,159.51 | 73.15,157.73 73.15,154.94 73.66,154.43 73.66,153.42 73.66,150.37 75.18,148.84 75.69,148.84 | 78.49,148.84 80.01,148.84 81.53,147.32 81.53,141.22 78.49,141.22 77.22,142.49 79.76,142.49 80.77,143.51 80.77,143.76 76.45,148.08 75.18,148.08 73.15,146.05 | 80.01,159.51 78.49,157.99 | 78.49,157.99 78.49,159.26 80.01,160.78 80.01,159.51 | 78.49,157.99 74.17,153.67 74.17,150.37 75.69,148.84 | 79.25,148.08 80.52,146.81 80.52,145.29 80.26,145.03 80.26,145.29 78.74,146.81 78.49,147.07 77.72,147.07 | 75.69,148.84 78.49,148.84 | 78.49,148.84 79.25,148.08 | 79.25,148.08 74.68,148.08 74.42,148.34 74.17,148.59
  Bottom 2.54: 62.99,153.42 67.06,153.42 69.09,155.45 69.09,163.83 70.1,164.85 72.64,164.85 | 66.04,152.91 66.04,153.16 66.29,153.42 67.56,153.42 70.87,156.72 70.87,163.07 72.64,164.85 | 72.64,164.85 78.74,164.85 80.26,163.32 | 73.91,163.32 73.41,163.32 72.64,162.56 73.15,162.56 73.91,163.32 | 73.91,163.32 80.26,163.32 | 80.26,163.32 78.99,162.05 78.74,161.8 | 73.91,161.54 74.17,161.8 76.45,161.8 | 78.74,161.8 78.49,161.8 76.45,161.8 | 76.45,161.8 73.91,159.26 73.91,161.04 72.64,162.31 72.64,160.53 73.15,160.02 | 62.23,153.16 62.23,153.67 60.71,153.67 60.71,141.73 80.26,141.73 73.15,148.84 73.15,152.65 73.15,153.42 | D14.C 64.52,141.73 62.48,143.76 X8.3 70.94,153.49 73.15,155.7 | 73.15,155.7 73.15,156.46 | 73.15,160.02 73.15,161.54 74.93,163.32 D12.A | 73.15,155.7 73.15,153.42 | 73.15,153.42 71.12,151.38 64.01,151.38 64.01,143.26 76.2,143.26 76.45,143 76.45,144.02 70.36,150.11 65.02,150.11 64.77,149.86 67.56,149.86 72.9,144.53 66.8,144.53 64.52,146.81 64.77,146.81 66.55,148.59 66.55,147.83 68.58,145.8 68.58,145.54 | 73.15,160.02 73.15,157.73 73.15,156.46 | 73.15,156.46 72.64,155.96 71.63,154.94 70.87,154.18 | 78.74,161.8 80.26,161.8 80.26,160.02 | 80.26,160.02 79.76,159.51 | 79.76,159.51 74.68,154.43 | 74.68,154.43 74.17,153.92 | 73.66,153.42 74.17,153.92 | 74.17,153.92 74.17,149.61 75.18,148.59 74.68,148.59 74.42,148.34 | 80.26,163.32 80.52,163.07 80.52,160.27 80.26,160.02 | 79.76,159.51 79.76,160.27 79.25,160.78 | 74.68,154.43 74.68,150.11 | 74.68,148.08 74.68,150.11 | 74.68,150.11 76.96,147.83 77.72,147.83 78.74,146.81
N$37
  Bottom 0.813: IC12.GND 153.92,149.61 152.65,150.88 152.65,159.77 152.4,160.02 | 188.21,159.51 187.71,160.02 | 179.58,159.77 178.82,159.77 C35.1 | C36.1 184.66,159.77 184.4,160.02 | 181.61,160.02 181.86,159.77 181.86,144.53 181.36,144.02 IC11.GND
  Bottom 1.016: 121.67,156.46 121.92,156.46 122.17,156.72 122.43,156.72 125.98,156.72 132.59,156.72 133.35,155.96 162.56,155.96 162.81,156.21 164.59,156.21 | 170.18,156.21 191.77,156.21 192.02,155.96 191.52,155.96 190.25,154.69 191.52,154.69 191.77,154.94 177.04,154.94 176.78,154.69 169.67,154.69 169.42,154.94 169.42,155.45 170.18,156.21 | 170.18,156.21 164.59,156.21 | 164.59,156.21 162.56,154.18 162.31,154.18 161.04,155.45 166.37,155.45 166.62,155.7
  Bottom 1.27: 146.56,166.37 140.72,166.37 140.46,166.62 C39.2 C38.2 126.49,169.42 125.98,169.93 C26.2 123.44,170.69 | 146.56,166.37 148.84,166.37 | 148.84,166.37 151.64,166.37 | 151.64,166.37 157.23,166.37 | 157.23,166.37 167.13,166.37 | 167.13,166.37 172.97,166.37 | 172.97,166.37 174.5,166.37 | 174.5,166.37 177.04,166.37 | 177.04,166.37 179.83,166.37 | 179.83,166.37 184.91,166.37 | 184.91,166.37 185.42,166.88 C42.2 | C25.2 123.44,170.69 | C27.2 146.3,166.62 146.56,166.37 | C28.2 151.38,166.62 151.64,166.37 | C40.2 157.23,166.37 | C41.2 166.88,166.62 167.13,166.37 | 174.24,166.62 174.5,166.37 | 150.37,160.02 142.49,160.02 C45.1 | 150.37,160.02 152.15,160.02 152.4,160.02 154.18,160.02 154.43,159.77 C34.1 | 170.18,160.02 161.8,160.02 162.05,159.77 C46.1 | 170.18,160.02 179.83,160.02 | 179.83,160.02 181.61,160.02 183.9,160.02 | 183.9,160.02 184.4,160.02 187.71,160.02 190.25,160.02 | 190.25,160.02 191.01,159.26 C48.1 | C33.1 150.37,160.02 | C47.1 170.18,156.21 170.18,160.02 | 179.58,159.77 179.83,160.02 | 183.64,159.77 183.9,160.02 | IC7.2 176.78,166.62 177.04,166.37 | C29.2 173.23,166.62 172.97,166.37 | C30.2 179.58,166.62 179.83,166.37 | IC8.2 123.44,170.69 | 109.73,210.82 101.85,210.82 100.36,209.32 X9.1 99.06,204.98 98.3,204.22 98.3,188.56 D15.A | 109.73,210.82 111,209.55 JP15.2 111,210.82 | D16.A 130.81,189.14 130.81,203.96 131.83,204.98 X10.1 133.35,205 133.35,210.57 133.6,210.82 | 111,210.82 109.73,210.82 | 111,210.82 133.6,210.82 | 143.51,210.82 143.76,210.82 | 143.76,210.82 159,210.82 | 159,210.82 168.66,210.82 | 168.66,210.82 188.21,210.82 189.99,209.04 JP27.8 | 159,210.82 158.78,210.59 X11.1 155.96,204.98 154.94,203.96 154.94,189.74 155.96,188.72 D17.A
  Bottom 1.27: 143.76,210.82 143.51,210.57 JP16.2 143.51,210.82 | 143.51,210.82 133.6,210.82 | JP27.8 JP27.7 JP27.5 | JP27.5 JP27.3 | JP27.3 JP27.1 | JP27.1 JP27.2 JP27.4 | JP27.4 JP27.6 | JP27.8 JP27.6 | JP27.6 JP27.5 | JP27.3 JP27.4 | JP28.6 JP28.8 | JP28.7 JP28.5 | JP28.5 JP28.3 | JP28.3 JP28.1 | JP28.1 JP28.2 JP28.4 | JP28.6 JP28.4 | JP28.4 JP28.3 | JP28.5 JP28.6 | 92.46,136.4 89.15,136.4 88.65,135.89 | D20.C 92.46,136.4 | 92.46,136.4 92.46,122.68 95,120.14 X12.1 100.36,115.04 102.36,113.03 111.25,113.03 | 111.25,113.03 135.13,113.03 | 135.13,113.03 145.8,113.03 | 145.8,113.03 162.56,113.03 | 162.56,113.03 173.74,113.03 | 173.74,113.03 190.75,113.03 192.53,114.81 JP28.1 | JP19.2 146.05,113.28 145.8,113.03 | JP18.2 173.23,113.54 173.74,113.03 | 162.56,113.03 162.33,113.26 X14.1 158.24,120.14 156.72,121.67 156.72,134.87 158.5,136.65 D18.C | 135.13,113.03 135.41,113.31 X13.1 132.59,120.65 130.81,122.43 130.81,135.13 131.83,136.14 D19.C | JP20.2 111.25,113.03 | IC10.GND 125.98,156.72 127.51,156.72 C32.1 | C31.1 123.19,155.96 122.43,156.72 | IC9.2 148.84,166.37 | 184.91,166.37 189.74,166.37 190.25,165.86 190.25,160.02 | IC9.2 148.84,156.21 135.89,156.21 C44.1 | IC9.2 148.84,163.32 149.1,163.07 192.28,163.07 193.04,163.83 193.04,194.56 JP27.1 | JP17.2 168.91,210.57 168.66,210.82
  Bottom 2.54: 58.67,159.77 60.2,159.77 60.96,159 60.96,157.99 60.2,157.23 60.2,157.73 59.69,158.24 59.69,158.5 | 184.91,166.37 184.91,160.27 185.67,159.51 | 151.64,166.37 151.64,160.53 152.15,160.02 | X8.2 59.69,158.5 | 59.69,158.5 54.86,158.5 53.59,157.23 53.59,134.37 55.12,132.84 86.61,132.84 88.65,134.87 88.65,135.89 88.65,154.94 91.44,157.73 106.17,157.73 C43.1 C37.2 117.86,166.88 121.16,170.18
  Bottom 3.81: 59.69,158.5 63.75,158.5
  pour Bottom (isolate 1.016): 54.36,213.11 188.72,213.36 196.09,207.52 196.09,117.6 189.48,111 56.64,111 50.55,117.09 50.04,208.53
(copper drawn outside any net)
  shapes: Bottom area x12

## Text on the board
Bottom: DC Power | GND | Supply | +15V / +12V / +5V | -15V / -12V / -5V | GND | DC Power | GND | Supply | +15V / +12V / +5V | -15V / -12V / -5V | GND